# Altium PCB CANSAT-Measurement-PWR-4v PCB.PcbDoc
Units mm, origin at the board's own origin, x right, y up, seen from the top; angles counter-clockwise.
Board outline 56.01 x 18.03 mm, 2 copper layers (Top Layer, Bottom Layer); 20 components, 11 nets, 52 pads, 0 vias.
Unrouted connection lines stored in the file: 85.
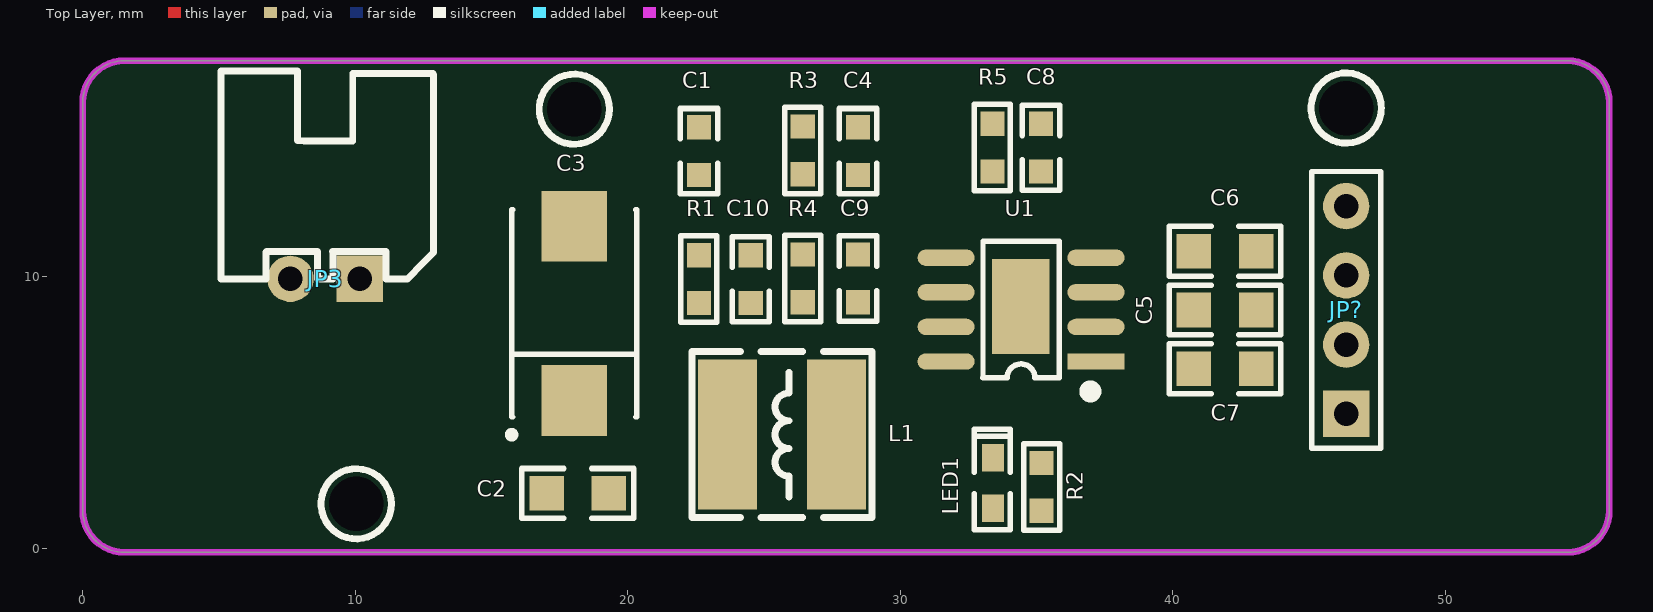
[diagram p0: Top Layer view]
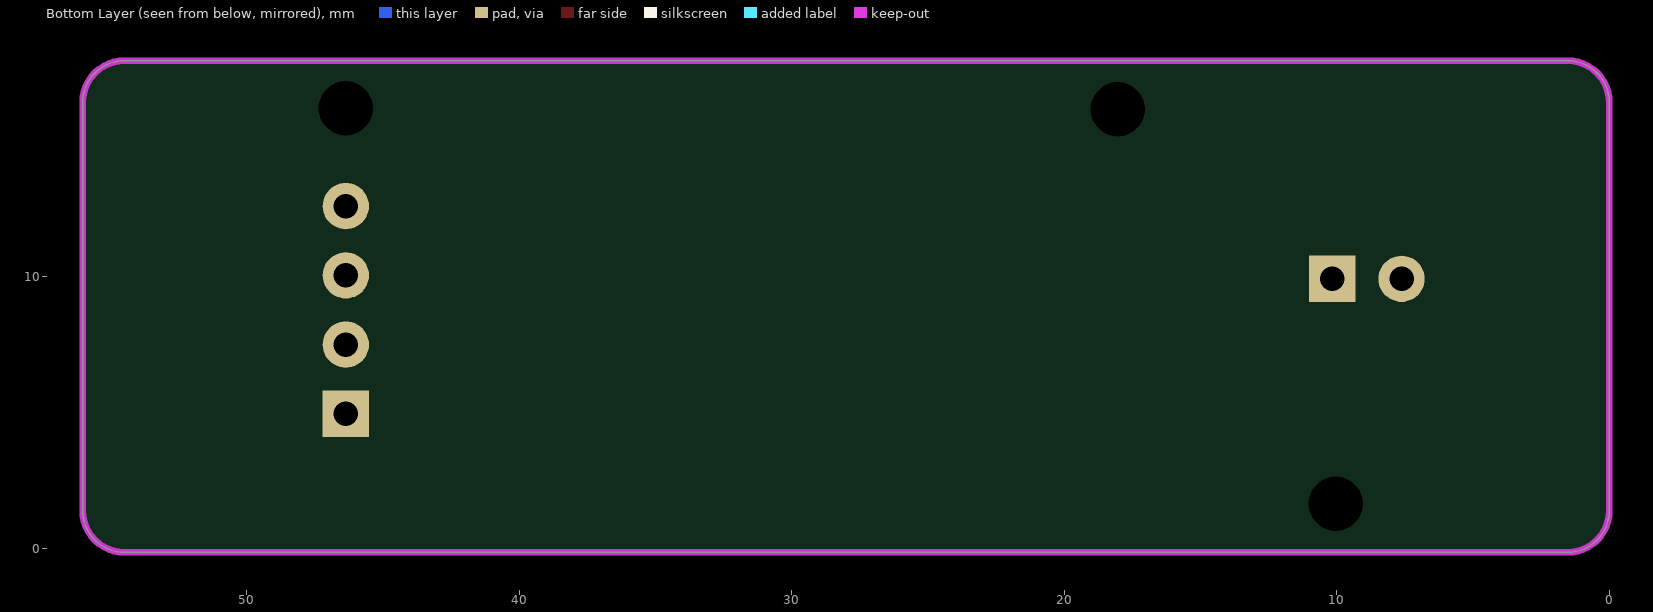
[diagram p1: Bottom Layer view, seen from below]

## Layer stack, top to bottom
Top Solder: solder mask 0.0102, Solder Resist, Dk 3.5
Top Layer: signal copper 0.0356
Dielectric 1: dielectric 0.32, FR-4, Dk 4.8
Bottom Layer: signal copper 0.0356
Bottom Solder: solder mask 0.0102, Solder Resist, Dk 3.5

## Board outline
1.524,-0.127 cw(c1.524,1.397) 0,1.397 0,16.383 cw(c1.524,16.383) 1.524,17.907 54.483,17.907 cw(c54.483,16.383) 56.007,16.383 56.007,1.397 cw(c54.483,1.397) 54.483,-0.127

## Design rules (kind name [scope] priority, off if disabled: settings)
Clearance [All] p1: gap=0.254 ignorepadtopadclearanceinfootprint=FALSE except(0: Arc-Hole Track-Hole SMDPad-Hole THPad-Hole Via-Hole Fill-Hole Poly-Hole Region-Hole Text-Hole)
PolygonConnect [All] p1: connectstyle=Relief reliefconductorwidth=0.254 reliefentries=4 polygonreliefangle="90 Angle" airgapwidth=0.254
RoutingVias [All] p1: holewidth=0.711 width=1.27 viastyle="Through Hole" minholewidth=0.711 minwidth=1.27 maxholewidth=0.711 maxwidth=1.27
SolderMaskExpansion [All] p1: expansion=0.102 istentingtop=FALSE
Width [All] p1: maxlimit=0.254 minlimit=0.254 preferedwidth=0.254
30 further rules are at their usual default settings.

## Components (designator, comment, footprint, x,y, rotation, side; value= is the part's Value field where it differs from the comment)
C1 "100nF" "C 0603" 22.606,14.605 r90 top
C2 "10uF" "C 0805" 18.161,2.032 r180 top
C3 "100uF" "CD D(7343)" 18.034,8.636 r90 top
C4 "nF" "C 0603" 28.448,14.58 r270 top
C5 "10uF" "C 0805" 41.91,8.763 r0 top
C6 "10uF" "C 0805" 41.91,10.922 r0 top
C7 "10uF" "C 0805" 41.91,6.604 r0 top
C8 "100nF" "C 0603" 35.154,14.732 r90 top
C9 "nF" "C 0603" 28.448,9.906 r270 top
C10 "1.2nF" "C 0603" 24.511,9.906 r90 top
JP3 "HDR-1X2" XH2.54-2P_H 10.16,9.906 r180 top
JP? "HDR-1X4" HDR-1X4 46.355,4.953 r90 top
L1 "2.2uH || 1uH" CD53 25.654,4.191 r180 top
LED1 "LED-SMD" "LED 0603R" 33.401,2.413 r90 top
R1 "10R" "R 0603" 22.606,9.906 r90 top
R2 "1.8K" "R 0603" 35.179,2.286 r90 top
R3 "12K" "R 0603" 26.416,14.605 r270 top
R4 "20K" "R 0603" 26.416,9.906 r270 top
R5 "2.2K" "R 0603" 33.375,14.732 r90 top
U1 "AP64501SP-13" SOP8_M-EP 34.427,8.777 r180 top

## Footprints (in the part's own frame and the unit in brackets; to place one, negate y for a bottom-side part, rotate by r counter-clockwise, add the part's x,y. Pads: shape width x height; smd on the part's side, far side on the other; paste and mask are expansions set on the pad)
"C 0603" [mil] "ï¿½Þ¼ï¿½ï¿½ï¿½ï¿½ï¿½Æ¬ï¿½ï¿½ï¿½ï¿½"
  rect 35x35 smd: 1(-35,0) 2(34,0)
  silkscreen extent -62,-27 61,27, body extent -31,-16 31,16, height 32
"C 0805" [mil] "ï¿½Þ¼ï¿½ï¿½ï¿½ï¿½ï¿½Æ¬ï¿½ï¿½ï¿½ï¿½"
  rect 50x50 smd: 1(-45,0) 2(45,0)
  silkscreen extent -81,-36 81,36, body extent -39,-24 39,24, height 20
CD53 [mm] "5.8*5.2*3.5mm£¨³¤¿í¸ß£©"
  rect 2.15x5.5 smd: 1(-2,0) 2(2,0)
  silkscreen extent -3.3,-3.05 3.3,3.05, body extent -2.87,-2.5 2.87,2.5, height 3.6
"CD D(7343)" [mm] "Capacitor, SM Tantalum; Body 7.3 x 4.3 mm (LxW typ)"
  rect 2.6x2.4 smd: 1(-3.2,0) 2(3.2,0)
  silkscreen extent -4.57,-2.3 3.8,2.42, body extent -3.65,-2.15 3.65,2.15, height 2.8
HDR-1X4 [mm] "ï¿½ï¿½ï¿½ë£¬4ï¿½ï¿½"
  rect 1.7x1.7 hole 0.9: 1(0,0)
  round 1.7 hole 0.9: 2(2.54,0) 3(5.08,0) 4(7.62,0)
  silkscreen extent -1.27,-1.27 8.89,1.27, body extent -1.27,-1.27 8.89,1.27, height 8.5
"LED 0603R" [mm] "ï¿½ï¿½É«0603LED"
  rect 1.016x0.8 smd: 1(-0.927,0) 2(0.927,0)
  silkscreen extent -1.71,-0.63 1.98,0.69, body extent -0.8,-0.4 0.8,0.4, height 0.61
"R 0603" [mil] "1/10Wï¿½ï¿½Æ¬ï¿½ï¿½ï¿½ï¿½"
  rect 35x35 smd: 1(-35,0) 2(34,0)
  silkscreen extent -63,-26 62,26, body extent -31,-16 32,16, height 16
SOP8_M-EP [mm] "5*6*1.8mm£¨³¤¿í¸ß£©"
  rect 2.1x0.6 smd: 1(-2.75,1.905)
  oval 2.1x0.6 smd: 2(-2.75,0.635) 3(-2.75,-0.635) 4(-2.75,-1.905) 5(2.75,-1.905) 6(2.75,-0.635) 7(2.75,0.635) 8(2.75,1.905)
  rect 2.1x3.5 smd: 9(0.01,-0.113)
  silkscreen extent -2.69,-2.5 1.4,3.15, body extent -3,-2.5 3,2.5, height 1.9
XH2.54-2P_H [mm] "½Ó²å¼þ£¬2P"
  rect 1.7x1.7 hole 0.9: 1(0,0)
  round 1.7 hole 0.9: 2(2.54,0)
  silkscreen extent -2.72,-7.62 5.08,0, body extent -2.5,-7.35 5.04,0.35, height 5.73

## Part data
C1 C2 C4 C5 C6 C7 C8 C9 C10: library part C, "Non-polar patch capacitor", BOM名称=无极性贴片电容, 学习资源=www.ooocke.com, 版权归属=源创客
C3: library part C-CD, "Solid Tantalum Chip Capacitor, Standard T491 Series - Industrial Grade", PackageDocument=Mar-2001, Code_JEITA=3528-21, ComponentLink1Description="Manufacturer Link", ComponentLink1URL=http://www.kemet.com/, ComponentLink2Description=Datasheet, ComponentLink2URL=http://www.kemet.com/kemet/web/homepage/kechome.nsf/vapubfilesname/F3102TA.pdf/$file/F3102TA.pdf, DatasheetDocument=Mar-2001, LatestRevisionDate=19-Mar-2004, LatestRevisionNote="Silkscreen dimensions re-sized.", PackageReference=B, Published=17-Jul-2002, Publisher="Altium Limited"
JP3: library part "Header 2", "2P Connector", BOM名称=2P接插件, 学习资源=www.ooocke.com, 版权归属=源创客
JP?: library part "Header 4", "4P Connector", BOM名称=4P接插件, 学习资源=www.ooocke.com, 版权归属=源创客
L1: library part L-CD, "Chip power inductor", BOM名称=功率电感, 学习资源=www.ooocke.com, 版权归属=源创客
LED1: "Patch LED", BOM名称=贴片LED, 学习资源=www.ooocke.com, 版权归属=源创客
R1 R2 R3 R4 R5: library part R, "Chip resistor", BOM名称="Chip resistor", 学习资源=www.ooocke.com, 版权归属=源创客

## Free pads (board coordinates)
  round 1.524 hole 2: 4(10.033,1.651) 4(18.034,16.129) 4(46.355,16.17)

## Nets (pads, with @x,y where several pads share a name; then routed paths per layer and width w, separated by ;. In a path a pad name is that pad's centre, name@x,y a point inside that pad or via, vN(x,y) a via of type N, cw(c..) or ccw(c..) an arc to the next point about the centre after c; other vN are vias at no path point)
4V: C2.1 C3.1 C4.1 JP3.1 L1.2 LED1.1 R3.1
GND: C2.2 C3.2 C5.2 C6.2 C7.2 C8.2 C9.2 C10.2 JP3.2 JP?.1 JP?.2 R2.1 R5.2 U1.7 U1.9
NetC1_1: C1.1 R1.2
NetC1_2: C1.2 U1.1
NetC4_2: C4.2 R3.2 R5.1 U1.5
NetC8_1: C8.1 U1.4
NetC9_1: C9.1 R4.1 U1.6
NetC10_1: C10.1 R4.2
NetL1_1: L1.1 R1.1 U1.8
NetLED1_2: LED1.2 R2.2
VBAT: C5.1 C6.1 C7.1 JP?.3 JP?.4 U1.2 U1.3

## Keep-outs
Keep-Out Layer:
  lines w0.254: 54.483,-0.127 ccw(c54.483,1.397) 56.007,1.397 ; 54.61,-0.127 49.022,-0.127 1.524,-0.127 cw(c1.524,1.397) 0,1.397 0,16.383 cw(c1.524,16.383) 1.524,17.907 54.483,17.907 cw(c54.483,16.383) 56.007,16.383 56.007,1.27

## Silkscreen, mask and mechanical layers (free items; w line width, h text height)
Top Overlay:
  circle w0.254: c10.033,1.651 r1.288
  circle w0.254: c18.034,16.129 r1.288
  circle w0.254: c46.355,16.17 r1.288
Mechanical 1:
  lines w0.254: 45.085,13.843 47.625,13.843